# EAGLE board main (EAGLE 7.1.0)
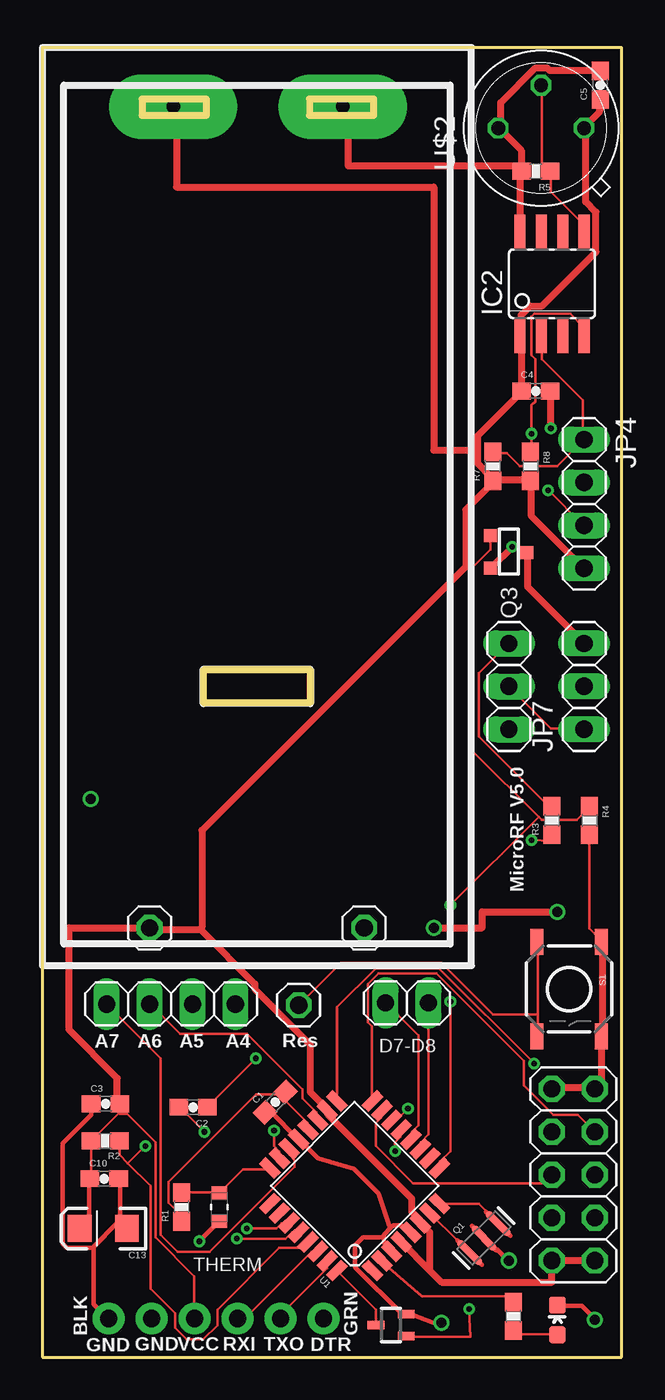
[diagram p0: board, top side]
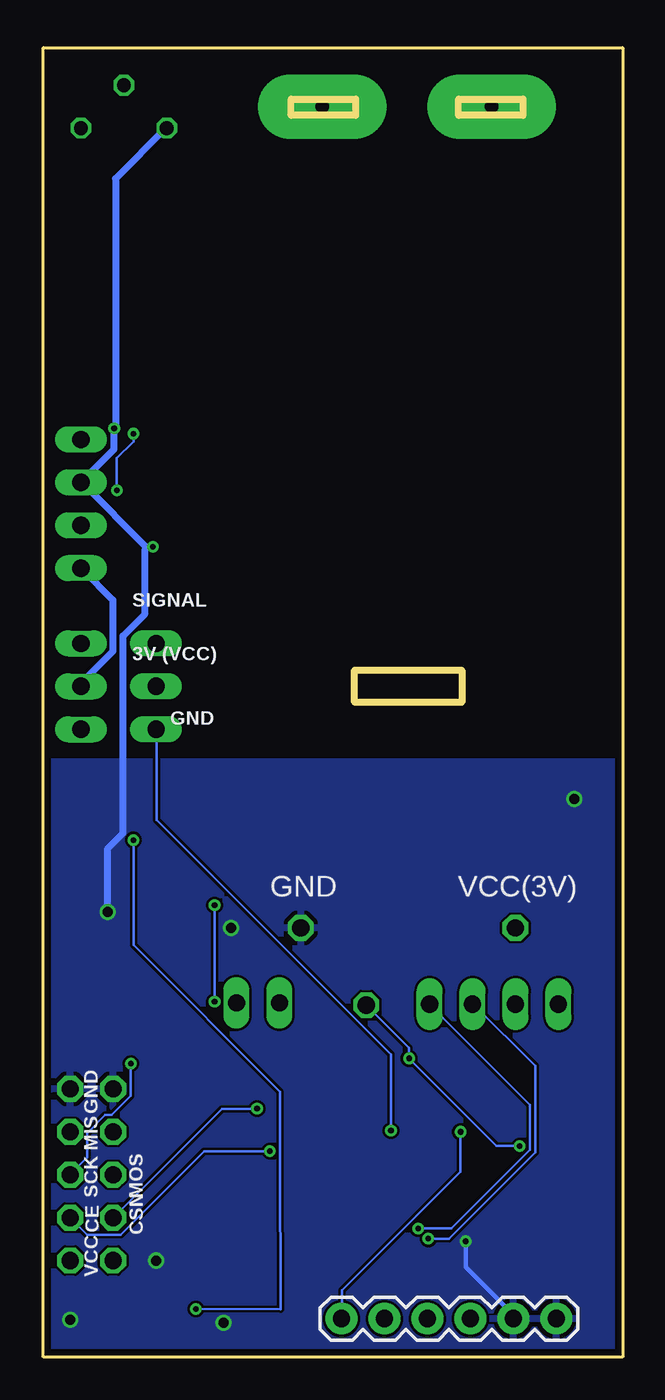
[diagram p1: board, bottom side, seen from below]

Size 34.29 x 77.47 mm. Coordinates in mm from the lower left corner, seen from the top.
Outline: 0,77.47 0,0 34.29,0 34.29,77.47 0,77.47
Outline: 9.53,40.64 9.53,38.73 15.88,38.73 15.88,40.64 9.53,40.64
Outline: 5.91,74.42 5.91,73.47 9.72,73.47 9.72,74.42 5.91,74.42
Outline: 15.81,74.42 15.81,73.47 19.62,73.47 19.62,74.42 15.81,74.42
Copper layers (1*16): Top 0.0356mm / dielectric 1.5011mm / Bottom 0.0356mm
Design rules "OSHParkDRU": minimum track width 6mil, minimum drill 13mil, track to track 6mil, track to pad 6mil, pad to pad 6mil, via to via 6mil, smd to smd 6mil, copper to edge 15mil, drill to drill 6mil, minimum pad ring 7mil, minimum via ring 7mil, stop-mask expansion 3mil, vias tented up to drill 0mil, thermal gap 10mil
Net classes: 0 default: width 0.152 mm; 1 vcc: width 0.406 mm; 2 GND: width 0.406 mm

## Footprints (pad centres in the part's own frame; a part is rotated, then mirrored left to right if it is on the bottom)
1X03 = drill 1.016 long: 1 -2.54,0; 2 0,0; 3 2.54,0
0603-CAP = smd 1.1 x 1: 1 -0.85,0; 2 0.85,0
EIA3216 = smd 1.4 x 1.6: A 1.4,0; C -1.4,0
0603-LED-ALT1 = smd 1 x 1: A 0,-0.877; C 0,0.877
1X02 = drill 1.016 long: 1 -1.27,0; 2 1.27,0
1X01 = drill 1.016 octagon: 1 0,0
SOIC08 = smd 0.66 x 2.032: 1 -1.905,-3.073; 2 -0.635,-3.073; 3 0.635,-3.073; 4 1.905,-3.073; 5 1.905,3.073; 6 0.635,3.073; 7 -0.635,3.073; 8 -1.905,3.073
1X06 = drill 1.016 pad 1.88: 1 0,0; 2 2.54,0; 3 5.08,0; 4 7.62,0; 5 10.16,0; 6 12.7,0
1X04 = drill 1.016 long: 1 -3.81,0; 2 -1.27,0; 3 1.27,0; 4 3.81,0
2X05 = drill 1.016 octagon: 1 -5.08,-1.27; 2 -5.08,1.27; 3 -2.54,-1.27; 4 -2.54,1.27; 5 0,-1.27; 6 0,1.27; 7 2.54,-1.27; 8 2.54,1.27; 9 5.08,-1.27; 10 5.08,1.27
RESONATOR-SMD-1:1 = smd 0.45 x 1.905: 1 -1.2,0; 2 0,0; 3 1.2,0
SOT-23 = smd 0.762 x 0.762: 1 -0.979,-1.101; 2 0.94,-1.101; 3 0.025,1.067
0603-RES = smd 1.1 x 1: 1 -0.85,0; 2 0.85,0
TACTILE-SWITCH-SMD-ALT01 = smd 1.524 x 0.762: 1 -2.794,1.905; 2 2.794,1.905; 3 -2.794,-1.905; 4 2.794,-1.905
SOT323 = smd 0.5 x 1: 1 0,0.9; 2 -0.65,-0.9; 3 0.65,-0.9
RESC1608X95N = smd 0.762 x 0.94: 1 -0.838,0; 2 0.838,0
TQFP32-08 = smd 1.27 x 0.559: 1 -4.293,2.8; 2 -4.293,2; 3 -4.293,1.2; 4 -4.293,0.4; 5 -4.293,-0.4; 6 -4.293,-1.2; 7 -4.293,-2; 8 -4.293,-2.8; 17 4.293,-2.8; 18 4.293,-2; 19 4.293,-1.2; 20 4.293,-0.4; 21 4.293,0.4; 22 4.293,1.2; 23 4.293,2; 24 4.293,2.8 | smd 0.559 x 1.27: 9 -2.8,-4.293; 10 -2,-4.293; 11 -1.2,-4.293; 12 -0.4,-4.293; 13 0.4,-4.293; 14 1.2,-4.293; 15 2,-4.293; 16 2.8,-4.293; 25 2.8,4.293; 26 2,4.293; 27 1.2,4.293; 28 0.4,4.293; 29 -0.4,4.293; 30 -1.2,4.293; 31 -2,4.293; 32 -2.8,4.293
AAABATTERY = drill 0.8 pad 3.81 long: GND 16.51,-1.27; VCC 6.477,-1.27
TO5 = drill 0.813 octagon: 1 0,-2.54; 2 2.54,0; 3 0,2.54

## Placement (x,y rotation side)
A0___D2  [1X03]  27.62,39.69 270 top
C1  0.1uF  [0603-CAP]  13.79,15.09 45 top
C2  0.1uF  [0603-CAP]  8.93,14.8 180 top
C3  0.1uF  [0603-CAP]  3.75,14.99 0 top
C4  1uF  [0603-CAP]  29.21,57.15 0 top
C5  1uF  [0603-CAP]  33.02,75.25 90 top
C10  0.1uF  [0603-CAP]  3.67,10.57 0 top
C13  10uF  [EIA3216]  3.62,7.62 180 top
D3  Green  [0603-LED-ALT1]  30.48,2.21 0 top
D7-D8  [1X02]  21.59,20.95 0 top
GND  [1X01]  19.05,25.4 0 top
IC2  Z8FS040BSB20EG-SOIC  [SOIC08]  30.16,63.5 0 top
JP1  FTDI Basic  [1X06]  16.64,2.29 0 bottom
JP3  [1X04]  7.62,20.89 0 top
JP4  [1X04]  32.07,50.48 270 top
JP5  [2X05]  31.43,10.79 90 top
JP6  [1X01]  15.18,20.83 0 top
JP7  [1X03]  32.07,39.69 90 top
Q1  8/16/20MHz  [RESONATOR-SMD-1:1]  26.13,7.05 45 top
Q3  [SOT-23]  27.62,47.62 270 top
R1  10K 1%  [0603-RES]  8.26,8.89 90 top
R2  10K  [0603-RES]  3.72,12.8 180 top
R3  10K  [0603-RES]  30.16,31.75 90 top
R4  10K  [0603-RES]  32.38,31.75 270 top
R5  47K  [0603-RES]  29.21,70.17 180 top
R6  330  [0603-RES]  27.88,2.43 270 top
R7  10K  [0603-RES]  26.67,52.7 90 top
R8  10K  [0603-RES]  28.89,52.7 270 top
S1  Reset  [TACTILE-SWITCH-SMD-ALT01]  31.18,21.78 270 top
T1  [SOT323]  20.64,1.91 90 top
THERM  10K Ohms  [RESC1608X95N]  10.48,8.89 270 top
U1  ATMEGA328  [TQFP32-08]  18.49,10.15 135 top
U$1  BAT  [AAABATTERY]  1.27,75.25 0 top
U$2  ZRE200GE  [TO5]  29.53,72.71 90 top
VCC(3V)  [1X01]  6.35,25.4 0 top

## Library data of the parts
A0___D2 D7-D8 GND JP3-JP7 VCC(3V) = pinhead
C1-C5 C10 C13 JP1 R1-R8 U1 = SparkFun
D3 Q1 S1 = Testing
IC2 = zilog; OC_FARNELL: unknown; OC_NEWARK: unknown
Q3 = transistors
T1 = zetex; MPN: DSS4160U-7; OC_FARNELL: 1710696; OC_NEWARK: 25R4558
THERM = Vishay_By_element14_Batch_1; MPN: NTCS0603E3103HMT; OC_FARNELL: 1874161; OC_NEWARK: 63H2050; SUPPLIER: Vishay; TOLERANCE: ± 3%; WATTAGE: 125 mW
U$1 = battery_wilkie
U$2 = zilog

## Nets
A0: A0___D2.3 U1.23
A1: R1.2 THERM.1 U1.24
A2: U1.25
A3: U1.26
A4: JP3.4 U1.27
A5: JP3.3 U1.28
A6: JP3.2 U1.19
A7: JP3.1 U1.22
AREF: C1.2 R1.1 U1.20
CE: JP5.3 U1.13
CSN: JP5.4 U1.14
D2: T1.1 U1.32
D5: Q3.1 R4.1 U1.9
D7: D7-D8.2 U1.11
D8: D7-D8.1 U1.12
DEBUG: IC2.2 JP4.1 R7.2
DTR: C2.2 JP1.1
GND [vcc]: C1.1 C3.1 C4.2 C5.2 C10.2 C13.C D3.C GND.1 IC2.8 JP1.5 JP1.6 JP4.2 JP5.9 JP5.10 Q1.2 Q3.2 R4.2 R5.2 S1.1 S1.2 T1.3 THERM.2 U1.3 U1.5 U1.21 U$1.GND U$2.3
LED/D4: R6.1 U1.2
MISO: JP5.7 U1.16
MOSI: JP5.6 U1.15
N$1: Q1.3 U1.8
N$2: Q1.1 U1.7
N$3: A0___D2.1 R3.2
N$4 [GND]: JP7.3 Q3.3
N$6: R3.1 T1.2
N$7: D3.A R6.2
RESET: C2.1 JP6.1 R2.1 S1.3 S1.4 U1.29
RXI: JP1.3 U1.30
S(SIG): IC2.5 R5.1 U$2.2
SCK: JP5.5 U1.17
SCREW_TERM: A0___D2.2 JP7.1
TXO: JP1.2 U1.31
VCC [vcc]: C3.2 C4.1 C5.1 C10.1 C13.A IC2.1 JP1.4 JP4.4 JP5.1 JP5.2 JP7.2 R2.2 R7.1 R8.2 U1.4 U1.6 U1.18 U$1.VCC U$2.1 VCC(3V).1
ZIG_RESET: IC2.4 JP4.3 R8.1

## Tracks (layer width: path | path; a pad name or v marks a point on that pad's centre or on a via)
A0  (via drill 0.33)
  Top 0.152: v13.72,13.41 13.72,12.5 14.02,12.19 14.02,11.81 U1.23
  Bottom 0.152: v13.72,13.41 13.72,17.91 27.58,31.77 27.58,37.11 A0___D2.3
A1
  Top 0.152: R1.2 8.31,9.75 10.44,9.75 THERM.1 10.52,9.75 11.89,11.12 13.41,11.12 U1.24
A4  (via drill 0.33)
  Top 0.152: v12.12,7.62 13.87,7.62 14.17,7.92 14.55,7.92 U1.27
  Bottom 0.152: v12.12,7.62 10.13,7.62 5.49,12.27 5.49,14.94 JP3.4
A5  (via drill 0.33)
  Top 0.152: v11.51,7.01 14.4,7.01 14.78,7.39 U1.28
  Bottom 0.152: v11.51,7.01 10.29,7.01 5.18,12.12 5.18,17.22 8.84,20.88 JP3.3
A6
  Top 0.152: U1.19 16.23,14.1 16.23,14.48 15.39,15.32 15.39,15.85 12.12,19.13 8.15,19.13 6.4,20.88 JP3.2
A7
  Top 0.152: U1.22 14.63,12.27 14.63,11.96 14.94,11.66 14.94,11.28 9.91,6.25 8,6.25 7.01,7.24 7.01,17.68 JP3.1
AREF
  Top 0.152: U1.20 15.7,13.49 15.7,13.87 14.33,15.24 14.33,15.54 C1.2 14.25,15.54 12.65,15.54 7.47,10.36 7.47,9.14 8.23,8.38 8.23,8.08 R1.1
CE  (via drill 0.33)
  Top 0.152: v20.88,12.19 20.88,12.72 21.18,13.03 21.18,13.41 U1.13
  Bottom 0.152: v20.88,12.19 24.77,12.19 29.72,7.24 31.7,7.24 32.69,8.23 JP5.3
CSN  (via drill 0.33)
  Top 0.152: v21.64,14.71 21.03,14.1 20.73,14.1 U1.14
  Bottom 0.152: v21.64,14.71 23.7,14.71 30.1,8.31 JP5.4
D2
  Top 0.152: T1.1 19.74,2.82 17.45,5.11 U1.32
D5  (via drill 0.33)
  Top 0.152: 29.38,31.97 29.57,31.77 31.62,31.77 32.38,32.54 R4.1 | 29.38,31.97 25.53,35.81 25.53,46.79 26.52,47.78 26.52,48.54 Q3.1 | v24.16,21.03 24.16,12.19 23.55,11.58 23.55,11.2 U1.9 | 29.38,31.97 v24.16,26.75
  Bottom 0.152: v24.16,26.75 v24.16,21.03
D7
  Top 0.152: D7-D8.2 22.86,13.18 22.4,12.72 22.4,12.34 U1.11
D8
  Top 0.152: U1.12 21.87,12.95 21.87,13.34 22.25,13.72 22.25,19.05 20.34,20.95 D7-D8.1
DEBUG
  Top 0.152: R7.2 26.67,53.49 27.51,53.49 28.27,52.73 30.48,52.73 32,54.25 JP4.1 32,54.33 32,56.62 29.57,59.05 29.57,60.43 IC2.2
DTR  (via drill 0.33)
  Top 0.152: v9.6,13.34 8.15,14.78 C2.2
  Bottom 0.152: v9.6,13.34 9.6,10.97 16.61,3.96 16.61,2.29 JP1.1
GND  (via drill 0.33, 0.6)
  Top 0.152: R4.2 32.38,25.38 33.07,24.69 | 23.46,1.92 23.47,1.91 v23.62,2.03
  Top 0.254: C10.2 4.6,10.55 4.6,8.04 4.94,7.7 C13.C 4.5,8 2.97,6.48 | 20.21,7.09 20.21,7.25 20.61,7.66 | 20.21,7.09 20.21,6.76 20.7,6.28 U1.3 | 20.61,7.66 20.78,7.82 21.26,7.82 21.75,7.33 U1.5 | 20.61,7.66 20.53,7.74 19.9,9.69 18.45,11.14 16.33,11.78 15.2,12.91 U1.21 15.09,12.95 13.56,14.48 13.26,14.48 C1.1 | 2.97,6.48 1.45,6.48 1.22,6.71 1.22,12.65 2.9,14.33 2.9,14.94 C3.1 | D3.C 30.48,3.05 31.93,3.05 32.69,2.29 v32.7,2.22 | 32.69,15.93 JP5.9 32.77,16 | 2.97,6.48 3.05,6.4 3.05,3.12 3.89,2.29 JP1.6 | 33.07,18.97 S1.2 | 33.15,24.54 S1.1 | 23.46,1.92 21.91,2.52 21.57,2.52 T1.3 21.41,2.52 21.34,2.52 18.52,5.33 18.52,6.63 18.97,7.09 20.21,7.09 | Q1.2 26.98,6.33 27.58,5.71 v27.62,5.71 | v9.3,6.86 10.44,8 THERM.2
  Top 0.406: 33.15,24.54 33.15,19.05 S1.2 | 33.07,18.97 33.07,16.24 JP5.9 | 32.69,15.93 30.21,15.93 JP5.10 | 33.07,24.69 S1.1 | 19.05,25.45 GND.1 | v23.18,25.4 26.04,25.4 26.04,26.35 v30.48,26.35 | v27.81,47.93 26.59,46.71 Q3.2 | v30.1,54.94 30.1,57.15 C4.2 | R5.2 28.35,70.18 28.35,71.4 27.05,72.69 U$2.3 27.13,72.85 27.13,74.22 29.18,76.28 29.87,76.28 30.02,76.12 32.99,76.12 C5.2 | IC2.8 28.27,66.6 28.27,70.03 R5.2 | U$1.GND 18.1,73.98 18.1,70.48 28.36,70.48 R5.2
  Bottom 0.254: 4.04,2.29 JP1.6 | v9.3,6.86 9.3,5.33 6.48,2.52 JP1.5
  Bottom 0.406: JP1.5 6.43,2.34 | 28.19,47.93 v27.81,47.93 | 28.19,47.93 32,51.74 JP4.2 30.1,53.72 v30.1,54.94 30.02,55.09 30.02,69.72 27.05,72.69 U$2.3 | v30.48,26.35 30.48,30.1 29.57,31.01 29.57,42.67 28.27,43.97 28.27,47.78 28.19,47.93
  other vias: 2.86,33.02
  pour Bottom: 0,35.24 0,0 34.29,0 34.29,35.24
LED/D4
  Top 0.152: R6.1 27.81,3.59 22.48,3.59 20.12,5.64 U1.2
MISO
  Top 0.152: U1.16 19.51,15.16 19.51,19.58 19.28,19.81 19.28,22.1 19.89,22.71 23.32,22.71 28.5,17.53 28.5,16.08 30.25,14.33 31.7,14.33 JP5.7
MOSI
  Top 0.152: U1.15 20.04,14.55 20.04,14.17 19.74,13.87 19.74,12.5 21.95,10.29 29.64,10.29 30.1,10.74 JP5.6
N$1
  Top 0.152: U1.8 23.55,9.07 25.83,9.07 26.21,8.69 26.26,8.62
N$2
  Top 0.152: U1.7 23.01,8.46 24.54,6.93 24.57,6.92
N$3
  Top 0.152: R3.2 30.1,32.61 29.95,32.61 25.83,36.73 25.83,40.46 27.58,42.22 A0___D2.1
N$4
  Top 0.406: JP7.3 28.73,45.57 28.73,47.55 Q3.3
N$6  (via drill 0.33)
  Top 0.152: v25.26,2.86 25.32,1.21 21.49,1.22 T1.2 | v28.96,30.59 30.11,30.54 R3.1
  Bottom 0.152: v25.26,2.86 20.24,2.85 20.27,11.96 20.27,15.7 28.96,24.38 v28.96,30.59
N$7
  Top 0.152: D3.A 30.48,1.37 28.04,1.37 27.89,1.52 R6.2
RESET  (via drill 0.33)
  Top 0.152: 5.07,11.47 6.4,10.13 6.4,4.04 7.85,2.59 7.85,1.75 8.53,1.07 9.53,1.07 10.36,1.91 10.36,2.82 14.02,6.48 15.39,6.48 15.7,6.78 U1.29 | 5.07,11.47 4.57,11.96 R2.1 | v12.65,17.68 9.83,14.86 C2.1 | v6.1,12.5 5.07,11.47 | 29.34,20.27 29.34,24.54 S1.3 | 29.34,20.27 29.34,19.05 S1.4 | 29.34,20.27 26.67,20.27 23.62,23.32 17.68,23.32 15.24,20.88 JP6.1
  Bottom 0.152: JP6.1 15.16,20.8 12.65,18.29 v12.65,17.68 7.47,12.5 v6.1,12.5
RXI
  Top 0.152: JP1.3 11.96,2.29 15.93,6.25 16.23,6.25 U1.30
S(SIG)
  Top 0.152: IC2.5 32,66.6 32,67.06 30.1,68.96 30.1,70.1 R5.1 30.02,70.18 29.57,70.64 29.57,75.21 U$2.2
SCK  (via drill 0.33)
  Top 0.152: v29.11,17.37 23.47,23.01 19.74,23.01 17.45,20.73 U1.17
  Bottom 0.152: v29.11,17.37 29.11,15.47 30.25,14.33 30.63,14.33 31.7,13.26 31.7,11.81 32.69,10.82 JP5.5
SCREW_TERM
  Top 0.152: JP7.1 32,37.19 30.1,37.19 27.66,39.62 A0___D2.2
TXO
  Top 0.152: JP1.2 14.1,2.52 16.84,5.26 16.84,5.64 U1.31
VCC
  Top 0.152: 2.9,12.8 2.9,10.67 C10.1 | 2.9,12.8 4.53,14.44 | 4.53,14.44 4.57,14.48 4.57,14.94 C3.2 4.57,15.01 | 2.9,12.8 R2.2 | 6.1,25.38 6.33,25.38 VCC(3V).1 6.4,25.38 | JP1.4 8.99,2.29 8.99,4.8 6.71,7.09 6.71,12.72 5.03,14.4 4.57,14.4 4.53,14.44
  Top 0.254: 21.24,6.8 U1.4 | C10.1 2.77,10.55 2.77,8.15 2.31,7.7 C13.A
  Top 0.406: JP5.1 JP5.2 30.16,4.45 23.63,4.45 22.93,5.14 | U1.4 22.93,5.14 | 4.57,15.01 4.45,15.14 4.45,16.51 1.59,19.37 1.59,25.4 VCC(3V).1 6.48,25.3 9.37,25.3 | 22.93,5.14 22.93,7.41 U1.6 22.33,8.15 21.87,8.61 21.87,9.37 16.92,14.33 16.92,14.55 U1.18 16.76,14.78 15.85,15.7 15.85,18.52 12.57,21.79 12.57,22.1 9.37,25.3 | R7.1 26.67,51.89 28.88,51.89 R8.2 28.96,51.66 28.96,49.76 32,46.71 JP4.4 | C5.1 32.99,74.37 32.99,73.69 32.08,72.77 U$2.1 32.16,72.54 32.16,68.35 32.77,67.74 32.77,65.38 29.57,62.18 28.88,62.18 28.35,61.65 28.35,60.58 IC2.1 28.35,60.35 28.35,57.15 C4.1 28.27,57 25.76,54.48 25.76,53.66 | 25.76,53.66 25.76,52.88 26.59,52.05 R7.1 | 9.37,25.3 9.45,25.45 9.45,31.17 25.07,46.79 25.07,50.14 26.59,51.66 R7.1 | U$1.VCC 7.94,73.98 7.94,69.22 23.18,69.22 23.18,53.66 25.76,53.66
  Bottom 0.406: JP7.2 32,39.7 32,39.93 30.18,41.76 30.18,44.81 32,46.63 JP4.4
ZIG_RESET  (via drill 0.33)
  Top 0.152: R8.1 28.96,53.57 v28.96,54.63 28.96,56.31 29.18,56.54 29.18,59.05 28.96,59.28 28.96,61.57 29.11,61.72 31.24,61.72 32,60.96 32,60.43 IC2.4 | v29.95,51.28 32,49.23 JP4.3
  Bottom 0.152: v29.95,51.28 29.95,53.19 28.96,54.18 v28.96,54.63

## Text on the board
tPlace: MicroRF V5.0 | A7 | A6 | A5 | A4 | Res | BLK | GND | GRN | GND | VCC | RXI | TXO | DTR
bPlace: SIGNAL | 3V (VCC) | GND | GND | MIS | MOS | SCK | CE | CSN | VCC
tValues: Valid combinations: | 168V / 3.3V Reg / 8MHz | 168 / 5V Reg / 16MHz | 168 / 5V Reg / 20MHz | Mark back accordingly